# Altium PCB bms_sub.PcbDoc
Units mm, origin at the board's own origin, x right, y up, seen from the top; angles counter-clockwise.
Board outline 161.78 x 65 mm, 2 copper layers (Top Layer, Bottom Layer); 62 components, 34 nets, 203 pads, 32 vias.
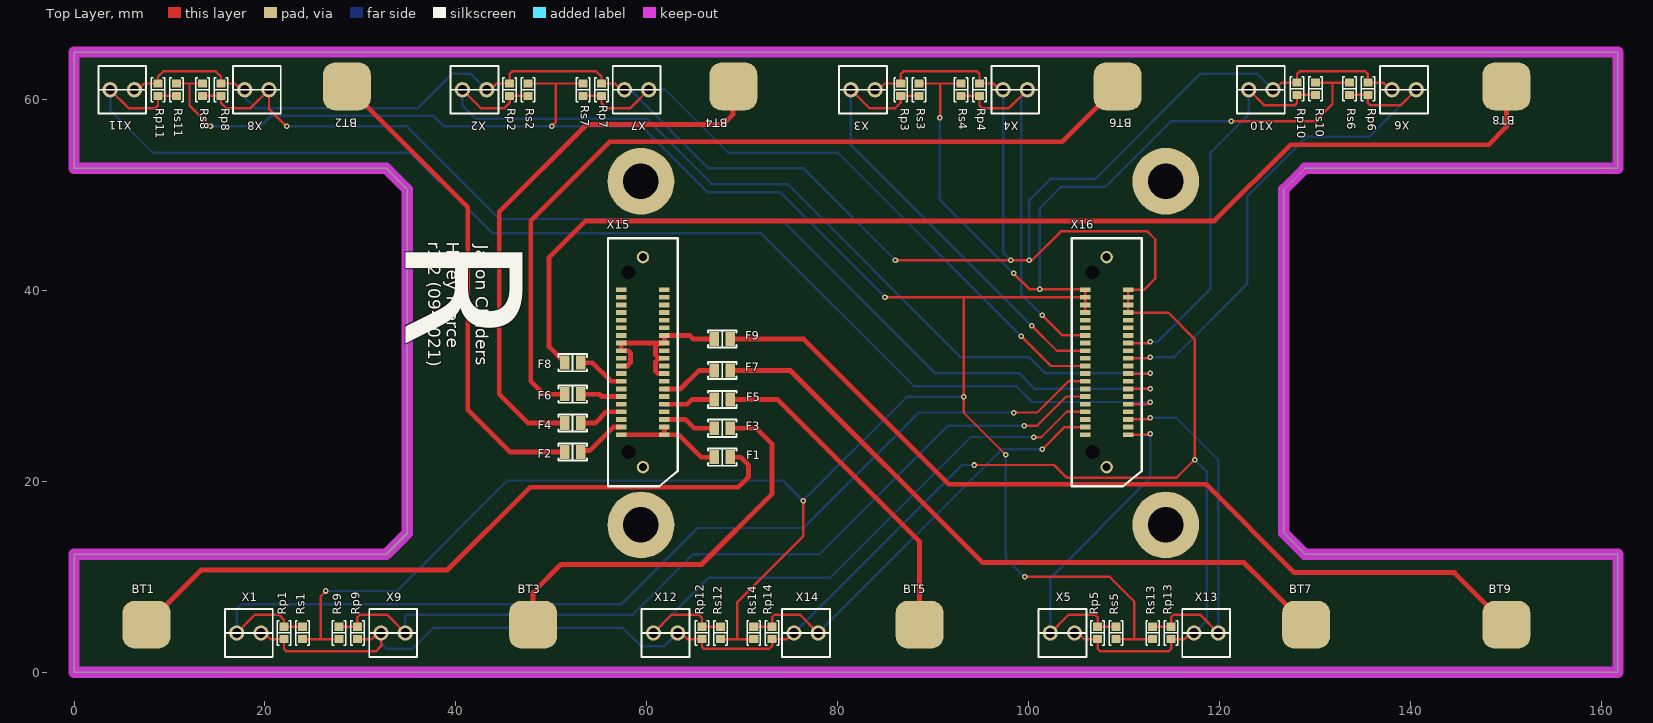
[diagram p0: Top Layer view]
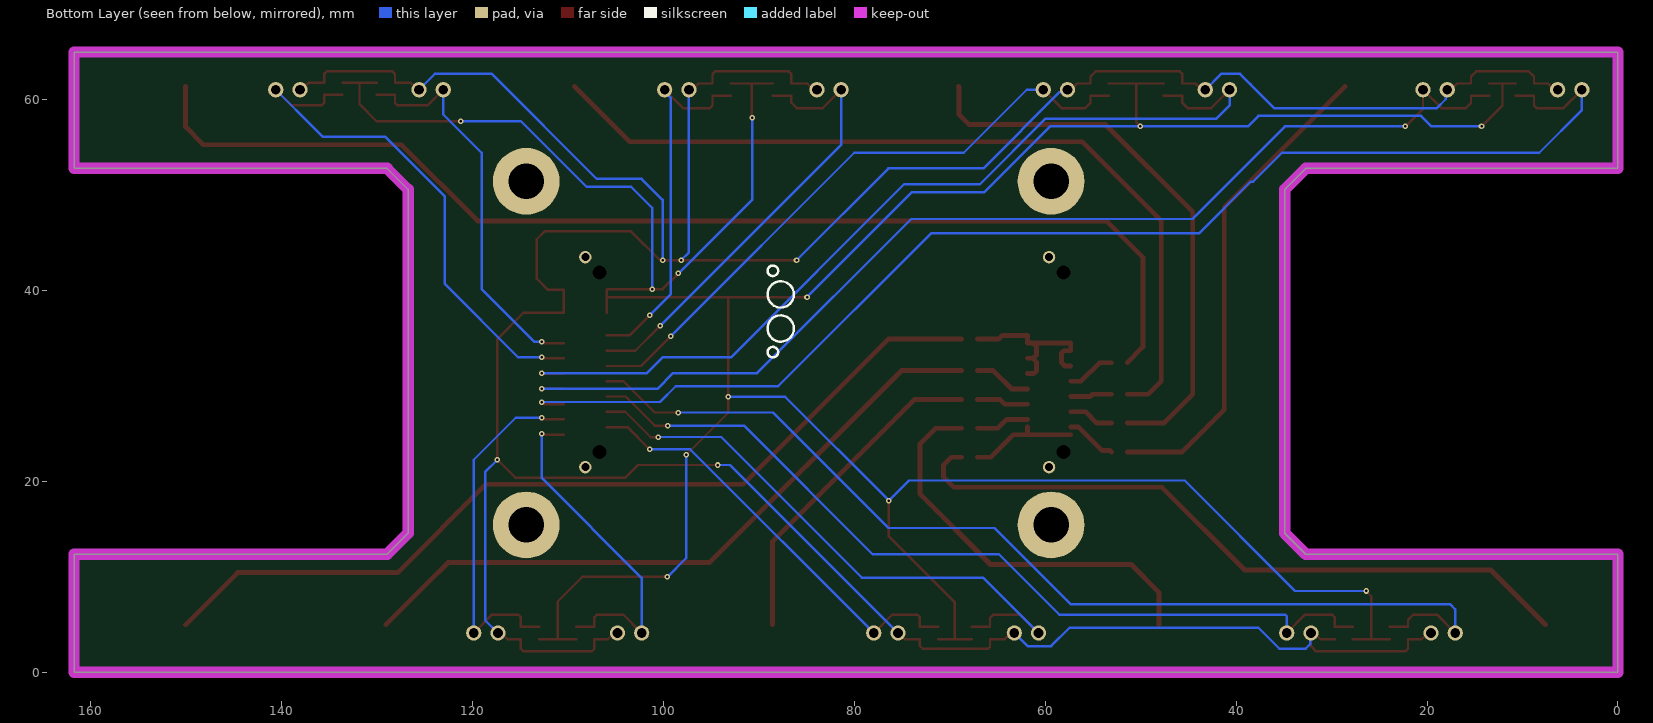
[diagram p1: Bottom Layer view, seen from below]
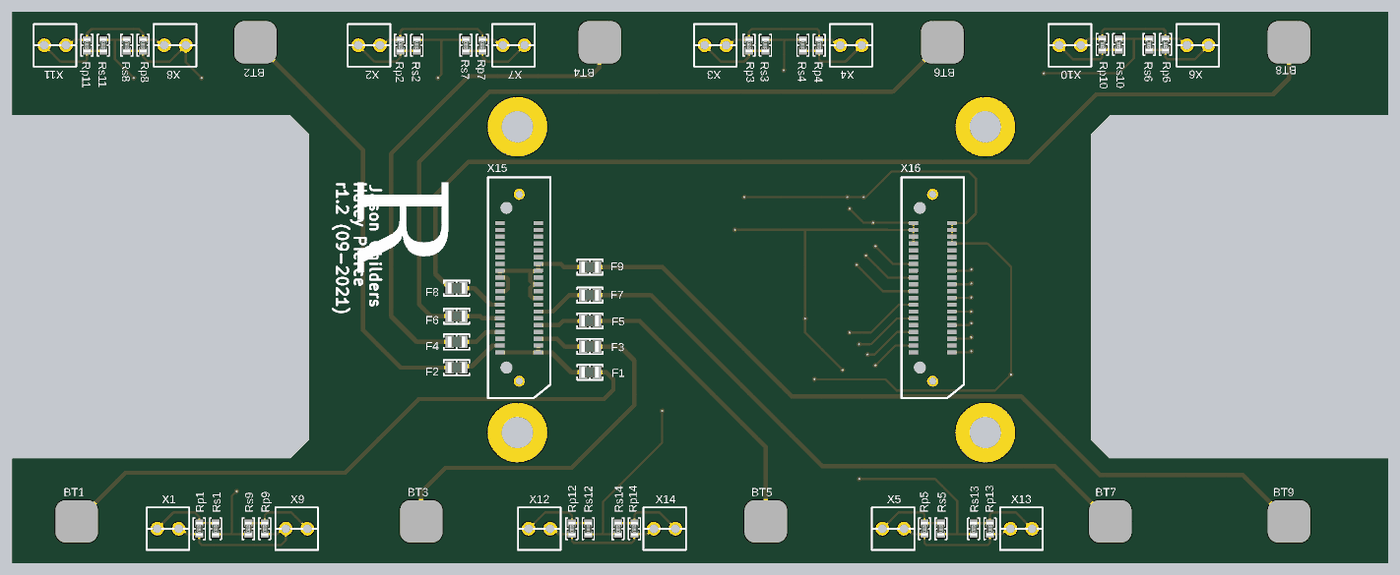
[diagram p2: 3D render of the assembled board from above, using the file's embedded part models]

## Layer stack, top to bottom
Top Solder: solder mask 0.0102, Solder Resist, Dk 3.5
Top Layer: signal copper 0.0356
Dielectric 1: dielectric 0.32, FR-4, Dk 4.8
Bottom Layer: signal copper 0.0356
Bottom Solder: solder mask 0.0102, Solder Resist, Dk 3.5

## Board outline
161.78,52.8 128.975,52.8 126.775,50.6 126.775,14.575 128.975,12.375 161.78,12.375 161.78,0 0,0 0,12.375 32.725,12.375 34.925,14.575 34.925,50.6 32.725,52.8 0,52.8 0,65 161.78,65

## Design rules (kind name [scope] priority, off if disabled: settings)
Clearance [InNetClass('All Nets')] p1: gap=0.152 ignorepadtopadclearanceinfootprint=FALSE
FabricationTestPointUsage TestPointUsage [All] p1: valid=0 allowmultiple=FALSE
FabricationTestpoint Testpoint [All] p1: side=3 testpointundercomponent=TRUE minsize=1.016 maxsize=2.54 preferedsize=1.524 minholesize=0.508 maxholesize=1.016 preferedholesize=0.813 testpointgrid=0.025 allowsidetop=TRUE allowsidebottom=TRUE usegrid=TRUE gridtolerance=0
HoleSize [All] p1: absolutevalues=TRUE maxlimit=6.274 minlimit=0.254 maxpercent=80.000 minpercent=20.000
PasteMaskExpansion PasteMaskExpansion_1 [InComponent('P1')] p1: expansion=-3.81
PasteMaskExpansion [All] p2: expansion=0
PlaneClearance [All] p1: clearance=0.127
PlaneConnect [All] p1: planeconnectstyle=Relief reliefexpansion=0.381 reliefentries=4 reliefconductorwidth=0.254 reliefairgap=0.254
PolygonConnect [All] p1: connectstyle=Relief reliefconductorwidth=0.254 reliefentries=4 polygonreliefangle="90 Angle" airgapwidth=0.254
RoutingVias [All] p1: holewidth=0.381 width=0.762 viastyle="Through Hole" minholewidth=0.254 minwidth=0.508 maxholewidth=0.381 maxwidth=1.27
SilkToSolderMaskClearance SilkscreenOverComponentPads [IsPad] p1: minsilkscreentomaskgap=0.254 clearancetoexposedcopper=TRUE
SolderMaskExpansion [All] p1: expansion=0.127 istentingtop=FALSE
UnRoutedNet [All] p1: checkbadconnections=TRUE
Width [All] p1: maxlimit=3.81 minlimit=0.152 preferedwidth=0.254
22 further rules are at their usual default settings.

## Classes and differential pairs
component class "U_Thermistor Linearization10": Rp10 Rs10 X10
component class "U_Thermistor Linearization7": Rp7 Rs7 X7
component class "U_Thermistor Linearization1": Rp1 Rs1 X1
component class "U_Thermistor Linearization9": Rp9 Rs9 X9
component class "U_Thermistor Linearization8": Rp8 Rs8 X8
channel class "Thermistor Linearization": "U_Thermistor Linearization2" "U_Thermistor Linearization3" "U_Thermistor Linearization4" "U_Thermistor Linearization5" "U_Thermistor Linearization6" "U_Thermistor Linearization7" "U_Thermistor Linearization11" "U_Thermistor Linearization12" "U_Thermistor Linearization13" "U_Thermistor Linearization14"
component class "U_Thermistor Linearization14": "R1_U_Thermistor Linearization14" "R2_U_Thermistor Linearization14" Rp14 Rs14 "X1_U_Thermistor Linearization14" X14
component class "U_Thermistor Linearization13": "R1_U_Thermistor Linearization13" "R2_U_Thermistor Linearization13" Rp13 Rs13 "X1_U_Thermistor Linearization13" X13
component class "U_Thermistor Linearization12": "R1_U_Thermistor Linearization12" "R2_U_Thermistor Linearization12" Rp12 Rs12 "X1_U_Thermistor Linearization12" X12
component class "U_Thermistor Linearization11": "R1_U_Thermistor Linearization9" "R2_U_Thermistor Linearization9" Rp11 Rs11 "X1_U_Thermistor Linearization9" X11
component class "U_Thermistor Linearization3": "R1_U_Thermistor Linearization8" "R2_U_Thermistor Linearization8" Rp3 Rs3 "X1_U_Thermistor Linearization8" X3
component class "U_Thermistor Linearization6": "R1_U_Thermistor Linearization6" "R2_U_Thermistor Linearization6" Rp6 Rs6 "X1_U_Thermistor Linearization6" X6
component class "U_Thermistor Linearization5": "R1_U_Thermistor Linearization5" "R2_U_Thermistor Linearization5" Rp5 Rs5 "X1_U_Thermistor Linearization5" X5
component class "U_Thermistor Linearization4": "R1_U_Thermistor Linearization4" "R2_U_Thermistor Linearization4" Rp4 Rs4 "X1_U_Thermistor Linearization4" X4
component class "U_Thermistor Linearization2": "R1_U_Thermistor Linearization2" "R2_U_Thermistor Linearization2" Rp2 Rs2 "X1_U_Thermistor Linearization2" X2
component class "U_Battery connections": BT1 BT2 BT3 BT4 BT5 BT6 BT7 BT8 BT9
component class "ThermistorTop with Connector": F1 F2 F3 F4 F5 F6 F7 F8 F9 X15 X16

## Components (designator, comment, footprint, x,y, rotation, side; value= is the part's Value field where it differs from the comment)
BT1 "Component_1" "Battery pad" 7.595,3.6 r0 top
BT2 "Component_1" "Battery pad" 28.595,60 r0 top
BT3 "Component_1" "Battery pad" 48.095,3.6 r0 top
BT4 "Component_1" "Battery pad" 69.095,60 r0 top
BT5 "Component_1" "Battery pad" 88.595,3.6 r0 top
BT6 "Component_1" "Battery pad" 109.347,60 r0 top
BT7 "Component_1" "Battery pad" 129.095,3.6 r0 top
BT8 "Component_1" "Battery pad" 150.095,60 r0 top
BT9 "Component_1" "Battery pad" 150.095,3.6 r0 top
F1 "Fuse" "NTC 0805/2012" 67.925,22.55 r180 top
F2 "Fuse" "NTC 0805/2012" 52.25,23.1 r0 top
F3 "Fuse" "NTC 0805/2012" 67.925,25.575 r180 top
F4 "Fuse" "NTC 0805/2012" 52.25,26.125 r0 top
F5 "Fuse" "NTC 0805/2012" 67.925,28.6 r180 top
F6 "Fuse" "NTC 0805/2012" 52.25,29.15 r0 top
F7 "Fuse" "NTC 0805/2012" 67.925,31.625 r180 top
F8 "Fuse" "NTC 0805/2012" 52.25,32.45 r0 top
F9 "Fuse" "NTC 0805/2012" 67.925,34.925 r180 top
Rp1 "51433" "RES 0603/1608" 22,4.125 r90 top
Rp2 "51433" "RES 0603/1608" 45.65,61.05 r270 top (schematic designator Rp1)
Rp3 "51433" "RES 0603/1608" 86.625,61.05 r270 top (schematic designator Rp1)
Rp4 "51433" "RES 0603/1608" 94.875,61.05 r270 top (schematic designator Rp1)
Rp5 "51433" "RES 0603/1608" 107.25,4.125 r90 top (schematic designator Rp1)
Rp6 "51433" "RES 0603/1608" 135.575,61.15 r270 top (schematic designator Rp1)
Rp7 "51433" "RES 0603/1608" 55.275,61.05 r270 top (schematic designator Rp1)
Rp8 "51433" "RES 0603/1608" 15.4,61.05 r270 top (schematic designator Rp1)
Rp9 "51433" "RES 0603/1608" 29.7,4.125 r90 top (schematic designator Rp1)
Rp10 "51433" "RES 0603/1608" 128.15,61.15 r270 top (schematic designator Rp1)
Rp11 "51433" "RES 0603/1608" 8.8,61.05 r270 top (schematic designator Rp1)
Rp12 "51433" "RES 0603/1608" 65.8,4.125 r90 top (schematic designator Rp1)
Rp13 "51433" "RES 0603/1608" 114.95,4.125 r90 top (schematic designator Rp1)
Rp14 "51433" "RES 0603/1608" 73.15,4.125 r90 top (schematic designator Rp1)
Rs1 "3918" "RES 0603/1608" 23.925,4.125 r90 top
Rs2 "3918" "RES 0603/1608" 47.575,61.05 r270 top (schematic designator Rs1)
Rs3 "3918" "RES 0603/1608" 88.55,61.05 r270 top (schematic designator Rs1)
Rs4 "3918" "RES 0603/1608" 92.95,61.05 r270 top (schematic designator Rs1)
Rs5 "3918" "RES 0603/1608" 109.175,4.125 r90 top (schematic designator Rs1)
Rs6 "3918" "RES 0603/1608" 133.65,61.15 r270 top (schematic designator Rs1)
Rs7 "3918" "RES 0603/1608" 53.35,61.05 r270 top (schematic designator Rs1)
Rs8 "3918" "RES 0603/1608" 13.475,61.05 r270 top (schematic designator Rs1)
Rs9 "3918" "RES 0603/1608" 27.775,4.125 r90 top (schematic designator Rs1)
Rs10 "3918" "RES 0603/1608" 130.075,61.15 r270 top (schematic designator Rs1)
Rs11 "3918" "RES 0603/1608" 10.725,61.05 r270 top (schematic designator Rs1)
Rs12 "3918" "RES 0603/1608" 67.725,4.125 r90 top (schematic designator Rs1)
Rs13 "3918" "RES 0603/1608" 113.025,4.125 r90 top (schematic designator Rs1)
Rs14 "3918" "RES 0603/1608" 71.225,4.125 r90 top (schematic designator Rs1)
X1 "640457-2" 640457 19.59,4.125 r180 top
X2 "640457-2" 640457 43.24,61.05 r180 top (schematic designator X1)
X3 "640457-2" 640457 83.94,61.05 r180 top (schematic designator X1)
X4 "640457-2" 640457 97.35,61.05 r0 top (schematic designator X1)
X5 "640457-2" 640457 104.84,4.125 r180 top (schematic designator X1)
X6 "640457-2" 640457 138.096,61.05 r0 top (schematic designator X1)
X7 "640457-2" 640457 57.685,61.05 r0 top (schematic designator X1)
X8 "640457-2" 640457 17.888,61.05 r0 top (schematic designator X1)
X9 "640457-2" 640457 32.175,4.125 r0 top (schematic designator X1)
X10 "640457-2" 640457 125.625,61.05 r180 top (schematic designator X1)
X11 "640457-2" 640457 6.325,61.05 r180 top (schematic designator X1)
X12 "640457-2" 640457 63.25,4.125 r180 top (schematic designator X1)
X13 "640457-2" 640457 117.36,4.125 r0 top (schematic designator X1)
X14 "640457-2" 640457 75.435,4.125 r0 top (schematic designator X1)
X15 "ERF8-020-XX.X-X-DV-L" ERF8-020-XX.X-X-DV-L 59.61,32.5 r270 top locked (schematic designator X2)
X16 "ERF8-020-XX.X-X-DV-L" ERF8-020-XX.X-X-DV-L 108.21,32.5 r270 top locked (schematic designator X3)

## Footprints (in the part's own frame and the unit in brackets; to place one, negate y for a bottom-side part, rotate by r counter-clockwise, add the part's x,y. Pads: shape width x height; smd on the part's side, far side on the other; paste and mask are expansions set on the pad)
640457 [mm]
  round 1.6 hole 1.02: 1(0,0) 2(2.54,0)
  silkscreen extent -1.23,-2.5 3.77,2.5
"Battery pad" [mm]
  rrect50% 5x5 smd: 1(0,1.397)
ERF8-020-XX.X-X-DV-L [mm]
  rect 0.5x1.1 smd mask+0.05: 1(7.6,2.261) 2(7.6,-2.261) 3(6.8,2.261) 4(6.8,-2.261) 5(6,2.261) 6(6,-2.261) 7(5.2,2.261) 8(5.2,-2.261) 9(4.4,2.261) 10(4.4,-2.261) 11(3.6,2.261) 12(3.6,-2.261) 13(2.8,2.261) 14(2.8,-2.261) 15(2,2.261) 16(2,-2.261) 17(1.2,2.261) 18(1.2,-2.261) 19(0.4,2.261) 20(0.4,-2.261) 21(-0.4,2.261) 22(-0.4,-2.261) 23(-1.2,2.261) 24(-1.2,-2.261) 25(-2,2.261) 26(-2,-2.261) 27(-2.8,2.261) 28(-2.8,-2.261) 29(-3.6,2.261) 30(-3.6,-2.261) 31(-4.4,2.261) 32(-4.4,-2.261) 33(-5.2,2.261) 34(-5.2,-2.261) 35(-6,2.261) 36(-6,-2.261) 37(-6.8,2.261) 38(-6.8,-2.261) 39(-7.6,2.261) 40(-7.6,-2.261)
  round 1.3 hole 0.838 mask+0.075: G1(-11,0) G2(11,0)
  round 0 hole 1.45 unplated: MH1(-9.4,-1.5) MH2(9.4,-1.5)
  silkscreen extent -13,-3.66 13,3.66
"NTC 0805/2012" [mm] "Chip Thermistor, 2-Leads, Body 2.00x1.25mm, IPC Medium Density"
  rect 1x1.45 smd: 1(-0.825,0) 2(0.825,0)
  silkscreen extent -1.5,-0.9 1.5,0.9, body extent -1,-0.64 1,0.64, height 1.27
"RES 0603/1608" [mm] "Chip Resistor, 2-Leads, Body 1.60x0.80mm, IPC Medium Density"
  rect 0.85x0.95 smd: 1(-0.65,0) 2(0.65,0)
  silkscreen extent -1.27,-0.7 1.27,0.7, body extent -0.8,-0.4 0.8,0.4, height 0.45

## Part data
F1 F2 F3 F4 F5 F6 F7 F8 F9: library part 12, "FUSE BOARD MOUNT 1A 32VDC 0805", createdby=Haley, Id=12, iinterrupt=50, itrip=1, Link=https://www.digikey.com/product-detail/en/vishay-beyschlag/MFU0805FF01000P100/MFU08051.00CT-ND/1206546, Name=MFU0805FF01000P100, quantity=0, vmax=32
Rp1 Rp2 Rp3 Rp4 Rp5 Rp6 Rp7 Rp8 Rp9 Rp10 Rp11 Rp12 Rp13 Rp14 Rs1 Rs2 Rs3 Rs4 Rs5 Rs6 Rs7 Rs8 Rs9 Rs10 Rs11 Rs12 Rs13 Rs14: library part 1, Package=0603, percent tolerance=5, Id=1, Name="0603 Resistor", quantity=0
  Rp1 Rp2 Rp3 Rp4 Rp5 Rp6 Rp7 Rp8 Rp9 Rp10 Rp11 Rp12 Rp13 Rp14: resistance=51433
  Rs1 Rs2 Rs3 Rs4 Rs5 Rs6 Rs7 Rs8 Rs9 Rs10 Rs11 Rs12 Rs13 Rs14: resistance=3918
X1 X2 X3 X4 X5 X6 X7 X8 X9 X10 X11 X12 X13 X14: library part 37, "2 pin header", createdby=Jason, Id=37, Name=640457-2, numcontacts=2, quantity=0
X15 X16: library part 36, Manufacturer=SAMTEC, CREATED="August 17, 2016 - Wendy Xin", createdby=Haley, Id=36, Link=https://www.digikey.com/product-detail/en/samtec-inc/ERF8-020-05.0-S-DV-L-TR/SAM13554CT-ND/9593848, Name=ERF8-020-XX.X-X-DV-L, numcontacts=40, numrows=2, PCB DECAL=ERM8-020-XX.X-X-DV-L, quantity=0

## Free pads (board coordinates)
  round 7 hole 3.7 unplated: 3(59.4,51.45) 4(59.4,15.45) 6(114.4,51.45)
  round 7 hole 3.7 unplated paste+5: 5(114.4,15.45)

## Via types
v1: diameter 0.58, hole 0.26, Top Layer to Bottom Layer, tented both sides, 32 vias

## Nets (pads, with @x,y where several pads share a name; then routed paths per layer and width w, separated by ;. In a path a pad name is that pad's centre, name@x,y a point inside that pad or via, vN(x,y) a via of type N, cw(c..) or ccw(c..) an arc to the next point about the centre after c; other vN are vias at no path point)
Battery_0: F1.2 X15.1 X15.2 X15.3 | length 11.5
  Top Layer w0.5: X15.2 X15.1 ; X15.3 X15.1 ; F1.2 65.725,22.55 63.375,24.9 X15.1
Battery_1: F2.2 X15.4 | length 5.4
  Top Layer w0.5: F2.2 53.207,23.232 54.032,23.232 56.5,25.7 X15.4
Battery_2: F3.2 X15.5 | length 5.6
  Top Layer w0.5: X15.5 64.048,26.5 64.973,25.575 F3.2
Battery_3: F4.2 X15.8 | length 4.8
  Top Layer w0.5: F4.2 54.6,26.125 55.775,27.3 X15.8
Battery_4: F5.2 X15.9 | length 5.4
  Top Layer w0.5: X15.9 64.26,28.1 64.76,28.6 F5.2
Battery_5: F6.2 X15.12 | length 4.4
  Top Layer w0.5: F6.2 55.062,29.15 55.312,28.9 X15.12
Battery_6: F7.2 X15.13 | length 6
  Top Layer w0.5: X15.13 63.548,29.7 65.473,31.625 F7.2
Battery_7: F8.2 X15.16 | length 5.1
  Top Layer w0.5: F8.2 54.325,32.45 56.275,30.5 X15.16
Battery_8: F9.2 X15.17 X15.20 X15.21 X15.24 X15.25 X15.26 X15.27 | length 19.7
  Top Layer w0.5: X15.20 57.95,32.1 58.302,32.452 58.302,33.448 58.05,33.7 X15.24 X15.26 61.302,34.5 ; X15.17 61.211,31.3 60.918,31.593 60.918,32.517 61.302,32.9 ; X15.21 61.302,32.9 ; F9.2 64.9,34.925 64.525,35.3 X15.27 X15.25 61.302,34.5 ; 61.302,32.9 60.918,33.283 60.918,34.117 61.302,34.5
GND: Rs1.1 Rs2.1 Rs3.1 Rs4.1 Rs5.1 Rs6.1 Rs7.1 Rs8.1 Rs9.1 Rs10.1 Rs11.1 Rs12.1 Rs13.1 Rs14.1 X16.34 X16.36 X16.38 X16.40 | length 365.6
  Top Layer w0.254: Rs11.1 12.1,61.7 ; Rs8.1 12.1,61.7 ; v1(14.3,57.2) 12.1,59.4 12.1,61.7 ; Rs1.1 25.85,3.475 ; v1(26.4,8.525) 25.85,7.975 25.85,3.475 ; Rs9.1 25.85,3.475 ; Rs2.1 50.463,61.7 ; v1(50.05,57.2) 50.463,57.613 50.463,61.7 ; Rs7.1 50.463,61.7 ; Rs12.1 69.475,3.475 ; Rs14.1 69.475,3.475 ; v1(76.4,18) 76.4,14.25 69.475,7.325 69.475,3.475 ; v1(84.975,39.325) 93.225,39.325 ; Rs3.1 90.75,61.7 ; v1(90.7,58.1) 90.75,58.15 90.75,61.7 ; Rs4.1 90.75,61.7 ; v1(97.625,22.806) 93.225,27.206 93.225,39.325 ; v1(98.45,41.8) 100.1,40.15 103.95,40.15 105.899,40.15 X16.40 X16.38 ; v1(99.6,10) 108.525,10 111.1,7.425 111.1,3.475 ; X16.34 X16.36 X16.38 ; Rs5.1 111.1,3.475 ; Rs13.1 111.1,3.475 ; v1(121.275,57.75) 130.075,57.75 131.862,59.538 131.862,61.8 ; Rs10.1 131.862,61.8 ; Rs6.1 131.862,61.8 ; 93.225,39.325 102.85,39.325 102.875,39.3 X16.38
  Bottom Layer w0.254: v1(14.3,57.2) 19.525,57.2 20.625,58.3 37.675,58.3 38.775,57.2 v1(50.05,57.2) 59.5,57.2 66.375,50.325 73.975,50.325 v1(84.975,39.325) ; v1(26.4,8.525) 33.825,8.525 45.4,20.1 74.3,20.1 v1(76.4,18) 87.275,28.875 v1(93.225,28.875) ; v1(90.7,58.1) 90.7,49.55 v1(98.45,41.8) ; v1(97.625,22.806) 97.625,11.975 v1(99.6,10) ; v1(101.2,40.15) 101.2,48.675 103.4,50.875 108.075,50.875 114.95,57.75 v1(121.275,57.75)
NetBT1_1: BT1.1 F1.1 | length 73
  Top Layer w0.5: BT1.1 13.323,10.725 39.125,10.725 47.8,19.4 69.6,19.4 70.675,20.475 70.675,21.725 69.85,22.55 F1.1
NetBT2_1: BT2.1 F2.1 | length 51.1
  Top Layer w0.5: BT2.1 41.25,48.742 41.25,27.5 45.65,23.1 F2.1
NetBT3_1: BT3.1 F3.1 | length 43
  Top Layer w0.5: BT3.1 48.095,8.395 51,11.3 65.75,11.3 73.15,18.7 73.15,23.925 71.5,25.575 F3.1
NetBT4_1: BT4.1 F4.1 | length 58.9
  Top Layer w0.5: F4.1 47.575,26.125 44.55,29.15 44.55,48.25 53.7,57.4 68,57.4 69.04,58.44 69.04,61.342 BT4.1
NetBT5_1: BT5.1 F5.1 | length 34.7
  Top Layer w0.5: F5.1 73.7,28.6 88.595,13.705 BT5.1
NetBT6_1: BT6.1 F6.1 | length 88.3
  Top Layer w0.5: F6.1 49.225,29.15 47.85,30.525 47.85,47.3 56.15,55.6 103.55,55.6 BT6.1
NetBT7_1: BT7.1 F7.1 | length 71.4
  Top Layer w0.5: F7.1 75.075,31.625 95.2,11.5 122.592,11.5 124.742,9.35 BT7.1
NetBT8_1: BT8.1 F8.1 | length 121.9
  Top Layer w0.5: F8.1 49.775,34.1 49.775,43.475 53.6,47.3 119.5,47.3 127.475,55.275 148.225,55.275 150.095,57.145 BT8.1
NetBT9_1: BT9.1 F9.1 | length 93.7
  Top Layer w0.5: F9.1 76.45,34.925 91.675,19.7 118.625,19.7 127.875,10.45 144.642,10.45 BT9.1
NetRp1_1: Rp1.1 Rp2.1 Rp3.1 Rp4.1 Rp5.1 Rp6.1 Rp7.1 Rp8.1 Rp9.1 Rp10.1 Rp11.1 Rp12.1 Rp13.1 Rp14.1 X1.1 X2.1 X3.1 X4.1 X5.1 X6.1 X7.1 X8.1 X9.1 X10.1 X11.1 X12.1 X13.1 X14.1 X16.33 X16.35 X16.37 X16.39 | length 395.3
  Top Layer w0.254: X11.1 6.689,61.05 7.339,61.7 Rp11.1 8.8,62.425 9.35,62.975 14.85,62.975 15.4,62.425 Rp8.1 16.874,61.7 17.524,61.05 X8.1 ; X1.1 19.954,4.125 20.604,3.475 Rp1.1 22,2.475 22.275,2.2 31.625,2.2 32.175,2.75 X9.1 31.811,4.125 31.161,3.475 Rp9.1 ; X2.1 43.604,61.05 44.254,61.7 Rp2.1 45.65,62.7 45.925,62.975 54.725,62.975 55.275,62.425 Rp7.1 56.671,61.7 57.321,61.05 X7.1 ; X12.1 63.614,4.125 64.264,3.475 Rp12.1 65.8,2.675 66,2.475 72.85,2.475 73.15,2.775 Rp14.1 74.7,3.475 75.35,4.125 X14.1 ; X3.1 84.304,61.05 84.954,61.7 Rp3.1 86.625,62.7 86.9,62.975 94.6,62.975 94.875,62.7 Rp4.1 96.336,61.7 96.986,61.05 X4.1 ; v1(86.075,43.175) v1(100.1,43.175) 100.375,43.175 103.4,46.2 112.475,46.2 113.3,45.375 113.3,41.25 112.15,40.1 X16.39 X16.33 114.65,37.7 117.425,34.925 v1(117.425,22.275) 115.55,20.4 104,20.4 102.675,21.725 v1(94.325,21.725) ; X5.1 105.204,4.125 105.854,3.475 Rp5.1 107.25,2.475 107.525,2.2 114.675,2.2 114.95,2.475 Rp13.1 116.346,3.475 116.996,4.125 X13.1 ; X10.1 125.795,61.05 126.545,61.8 Rp10.1 128.15,62.7 128.425,62.975 135.3,62.975 135.575,62.7 Rp6.1 137.176,61.8 137.926,61.05 X6.1
  Bottom Layer w0.254: X8.1 18.05,60.888 18.05,60.05 18.975,59.125 36.025,59.125 38.5,61.6 39.6,62.7 41.59,62.7 X2.1 ; X9.1 32.256,4.044 32.256,2.944 32.725,2.475 35.475,2.475 37.675,4.675 57.475,4.675 59.4,2.75 61.875,2.75 X12.1 ; X7.1 57.943,60.792 58.508,60.792 66.5,52.8 76.45,52.8 v1(86.075,43.175) ; X14.1 93.035,21.725 v1(94.325,21.725) ; X4.1 97.35,44 v1(98.175,43.175) ; v1(100.1,43.175) 100.1,49.5 102.3,51.7 107,51.7 118,62.7 123.975,62.7 X10.1 ; X13.1 118.7,5.465 118.7,21 v1(117.425,22.275) 117.425,22.187 v1@117.36,22.122
TEMP1: Rp5.2 Rs5.2 X5.2 X16.1 | length 36.3
  Top Layer w0.254: X5.2 104.225,6.05 106.975,6.05 107.25,5.775 Rp5.2 Rs5.2 ; X16.1 112.537,24.9 112.662,25.025 v1(112.75,25.025)
  Bottom Layer w0.254: X5.2 102.3,9.9 112.75,20.35 v1(112.75,25.025)
TEMP2: Rp14.2 Rs14.2 X14.2 X16.4 | length 45.6
  Top Layer w0.254: Rs14.2 Rp14.2 73.15,5.775 73.425,6.05 76.05,6.05 X14.2 ; v1(101.475,23.375) 103.8,25.7 X16.4
  Bottom Layer w0.254: X14.2 97.225,23.375 v1(101.475,23.375)
TEMP3: Rp13.2 Rs13.2 X13.2 X16.5 | length 38.3
  Top Layer w0.254: X16.5 112.575,26.5 v1(112.75,26.675) ; Rs13.2 Rp13.2 114.95,5.775 115.225,6.05 117.975,6.05 X13.2
  Bottom Layer w0.254: v1(112.75,26.675) 115.5,26.675 119.9,22.275 X13.2
TEMP4: Rp12.2 Rs12.2 X12.2 X16.8 | length 63.7
  Top Layer w0.254: X12.2 62.635,6.05 65.45,6.05 65.8,5.7 Rp12.2 Rs12.2 ; v1(100.557,24.656) 100.583,24.63 101.355,24.63 104.025,27.3 X16.8
  Bottom Layer w0.254: X12.2 66.518,9.932 79.232,9.932 93.956,24.656 v1(100.557,24.656)
TEMP5: Rp11.2 Rs11.2 X11.2 X16.9 | length 135
  Top Layer w0.254: X11.2 5.71,59.125 8.525,59.125 8.8,59.4 Rp11.2 Rs11.2 ; X16.9 112.525,28.1 v1(112.75,28.325)
  Bottom Layer w0.254: X11.2 3.785,58.915 8.25,54.45 35.2,54.45 38.225,51.425 38.475,51.425 43.9,46 71.975,46 88,29.975 98.725,29.975 100.375,28.325 v1(112.75,28.325)
TEMP6: Rp9.2 Rs9.2 X9.2 X16.12 | length 91.4
  Top Layer w0.254: Rs9.2 Rp9.2 29.7,5.775 29.975,6.05 32.79,6.05 X9.2 ; v1(99.55,25.85) 100.925,25.85 103.975,28.9 X16.12
  Bottom Layer w0.254: X9.2 34.715,5.886 34.879,6.05 58.55,6.05 64.875,12.375 78.1,12.375 91.575,25.85 v1(99.55,25.85)
TEMP7: Rp8.2 Rs8.2 X8.2 X16.13 | length 117.5
  Top Layer w0.254: Rs8.2 Rp8.2 15.4,59.675 15.95,59.125 18.503,59.125 X8.2 20.428,59.047 v1(22.275,57.2) ; X16.13 v1(112.75,29.7)
  Bottom Layer w0.254: v1(22.275,57.2) 34.9,57.2 44.6,47.5 74.05,47.5 90.2,31.35 99,31.35 100.65,29.7 v1(112.75,29.7)
TEMP8: Rp1.2 Rs1.2 X1.2 X16.16 | length 109.9
  Top Layer w0.254: X1.2 18.975,6.05 21.45,6.05 22,5.5 Rp1.2 Rs1.2 ; v1(98.45,27.225) 100.925,27.225 104.2,30.5 X16.16
  Bottom Layer w0.254: X1.2 17.05,6.6 17.6,7.15 57.35,7.15 65.325,15.125 76.45,15.125 88.55,27.225 v1(98.45,27.225)
TEMP9: Rp2.2 Rs2.2 X2.2 X16.17 | length 96.2
  Top Layer w0.254: X2.2 42.625,59.125 45.1,59.125 45.65,59.675 Rp2.2 Rs2.2 ; X16.17 112.7,31.3 v1(112.75,31.35)
  Bottom Layer w0.254: X2.2 40.7,59.4 42.075,58.025 59.975,58.025 66.85,51.15 74.8,51.15 92.95,33 100.1,33 101.75,31.35 v1(112.75,31.35)
TEMP10: Rp7.2 Rs7.2 X7.2 X16.20 | length 66.3
  Top Layer w0.254: Rs7.2 Rp7.2 55.275,59.675 55.825,59.125 58.3,59.125 X7.2 ; v1(99.275,35.2) 102.375,32.1 X16.20
  Bottom Layer w0.254: X7.2 61.95,61.05 68.55,54.45 80.025,54.45 v1(99.275,35.2)
TEMP11: Rp6.2 Rs6.2 X6.2 X16.21 | length 55.8
  Top Layer w0.254: X16.21 112.65,32.9 v1(112.75,33) ; Rs6.2 Rp6.2 135.575,59.675 135.85,59.4 138.986,59.4 X6.2
  Bottom Layer w0.254: v1(112.75,33) 115.225,33 122.925,40.7 122.925,49.868 129.157,56.1 135.686,56.1 136.511,56.925 X6.2
TEMP12: Rp3.2 Rs3.2 X3.2 X16.24 | length 48.1
  Top Layer w0.254: X3.2 83.325,59.125 86.05,59.125 86.625,59.7 Rp3.2 Rs3.2 ; v1(100.375,36.3) 102.975,33.7 X16.24
  Bottom Layer w0.254: X3.2 81.4,55.275 v1(100.375,36.3)
TEMP13: Rp10.2 Rs10.2 X10.2 X16.25 | length 42.1
  Top Layer w0.254: X16.25 112.512,34.5 112.662,34.65 v1(112.75,34.65) ; X10.2 124.735,59.4 127.875,59.4 128.15,59.675 Rp10.2 Rs10.2
  Bottom Layer w0.254: v1(112.75,34.65) 113.575,34.65 119.075,40.15 119.075,54.45 123.085,58.46 X10.2
TEMP14: Rp4.2 Rs4.2 X4.2 X16.28 | length 39
  Top Layer w0.254: Rs4.2 Rp4.2 94.875,59.4 95.15,59.125 97.965,59.125 X4.2 ; v1(101.475,37.4) 103.575,35.3 X16.28
  Bottom Layer w0.254: X4.2 99.89,60.843 99.275,60.228 99.275,39.6 v1(101.475,37.4)
pads on no net: X15.6 X15.7 X15.10 X15.11 X15.14 X15.15 X15.18 X15.19 X15.22 X15.23 X15.28 X15.29 X15.30 X15.31 X15.32 X15.33 X15.34 X15.35 X15.36 X15.37 X15.38 X15.39 X15.40 X15.G1 X15.G2 X15.MH1 X15.MH2 X16.2 X16.3 X16.6 X16.7 X16.10 X16.11 X16.14 X16.15 X16.18 X16.19 X16.22 X16.23 X16.26 X16.27 X16.29 X16.30 X16.31 X16.32 X16.G1 X16.G2 X16.MH1 X16.MH2

## Keep-outs
Keep-Out Layer:
  the board outline again, w1.2

## Silkscreen, mask and mechanical layers (free items; w line width, h text height)
Top Overlay:
  text "R" at 30.752,45.657 h21 r270
  text "Haley Pierce / r1.2 (09-2021)" at 37.125,45.1 h1.3 r270
  text "Jason Childers" at 42.075,44.825 h1.3 r270
Bottom Overlay:
  circle w0.254: c88.55,42.075 r0.55
  circle w0.254: c88.55,33.55 r0.55
  circle w0.254: c87.725,39.6 r1.375
  circle w0.254: c87.725,36.025 r1.375
Mechanical 1:
  lines w0.254: 114.6,15.5 134,22.2 ; 134,22.2 182.2,22.2 182.2,27.4 134,27.4 134,22.2
  text "9774100151R (Wurth) Standoff x4" at 135.854,23.954 h1.52

## Text inside footprints (layer, text, board x,y; h text height)
X15: Mechanical 1 "J1" at 59.108,32.991 h0.75 r270
X16: Mechanical 1 "J1" at 107.708,32.991 h0.75 r270